# Altium PCB CW308T_SPC56.PcbDoc (part 2 of 2)
Units mil, origin at the board's own origin, x right, y up, seen from the top; angles counter-clockwise.
Board outline 2060 x 3180 mil, 2 copper layers (Component Side, Solder Side), stack 62.8 mil thick; 83 components, 64 nets, 689 pads, 120 vias.
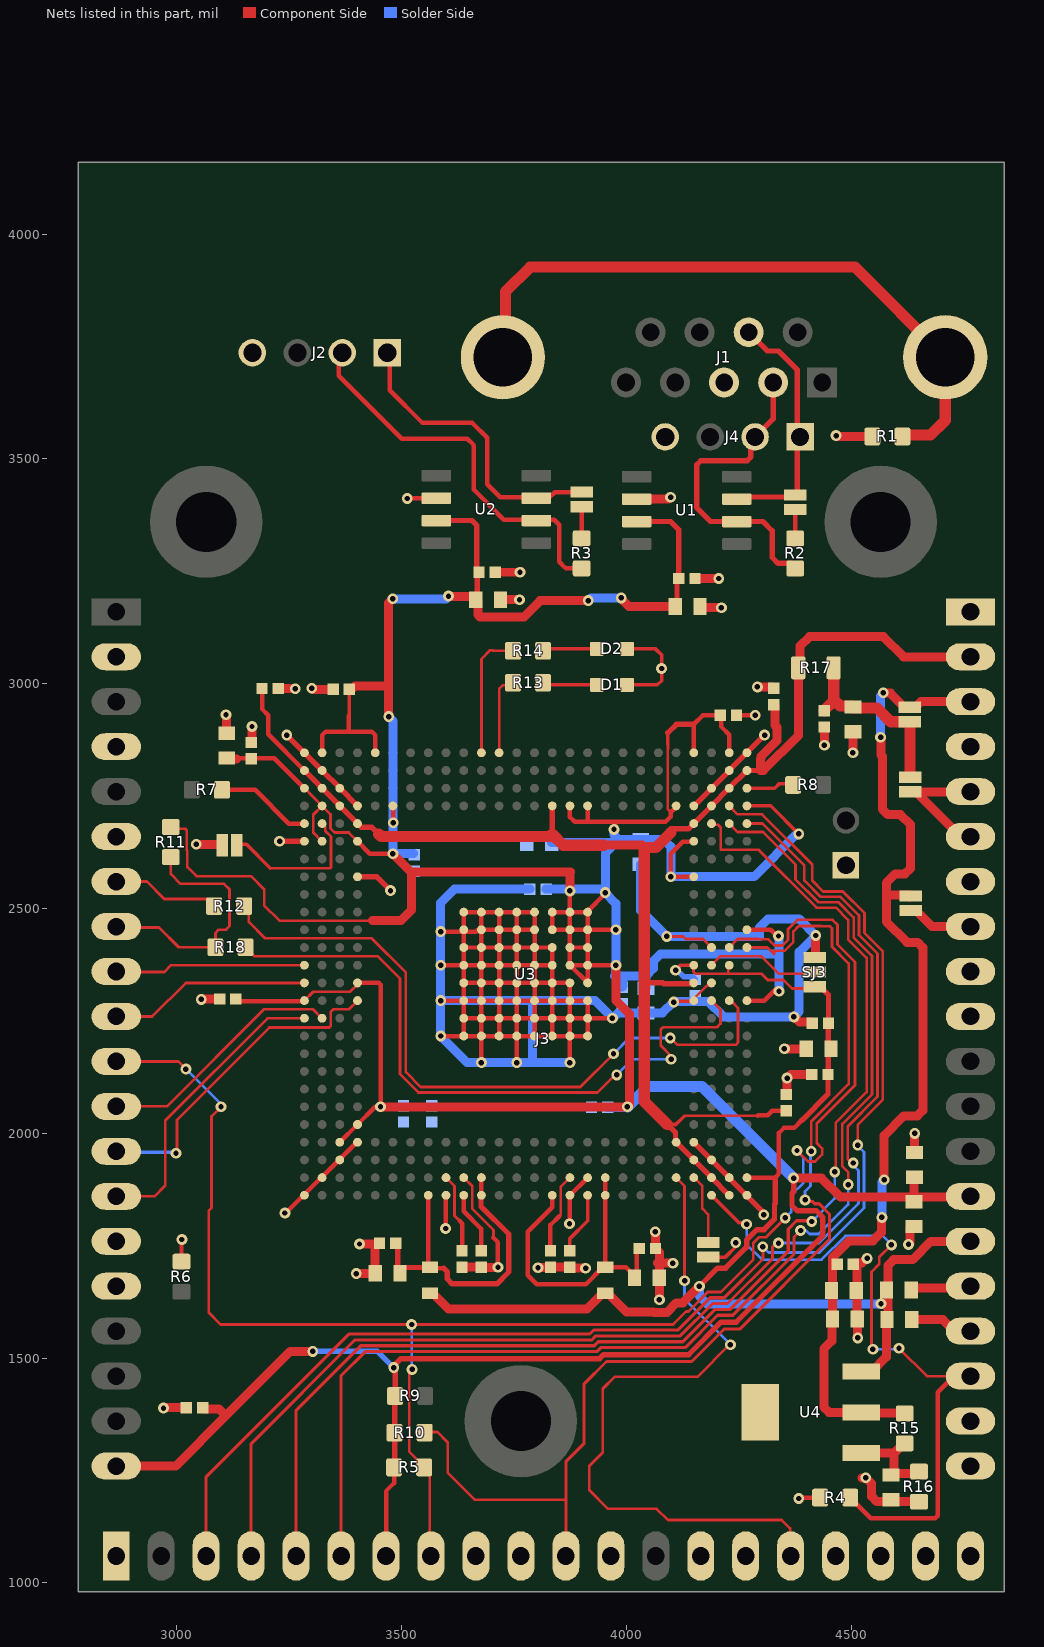
[diagram p2: the nets of this part, all layers, seen from the top]

## Via types
v1: diameter 24, hole 12, Component Side to Solder Side, tented both sides, 120 vias

## Nets (pads, with @x,y where several pads share a name; then routed paths per layer and width w, separated by ;. In a path a pad name is that pad's centre, name@x,y a point inside that pad or via, vN(x,y) a via of type N, cw(c..) or ccw(c..) an arc to the next point about the centre after c; other vN are vias at no path point) (continued)
GND: B1.2 B2.2 B3.2 C1.2 C2.2 C3.2 C4.2 C5.2 C6.2 C7.2 C8.2 C9.2 C10.2 C11.2 C12.2 C13.2 C14.2 C15.2 C16.2 C17.2 C18.2 C19.2 C20.2 C21.2 C22.2 C23.2 C24.2 C25.2 C26.2 C27.2 C28.2 C29.2 C30.2 C31.2 C32.2 C33.2 C34.2 C35.2 C36.2 C37.2 C38.2 C39.2 C40.2 C41.2 D1.K D2.K J1.3 J2.4 J3.A2 J3.A4 J3.A6 J3.A15 J3.A16 J3.B1 J3.B9 J3.B10 J3.B12 J3.B14 J3.C1 J3.C4 J3.C7 J3.C9 J3.C10 J3.C16 J3.C17 J4.4 JP1.1 R1.1 R4.1 R6.2 R16.2 SJ3.1 SJ4.1 SJ8.1 U1.2 U2.2 U3.A1 U3.A11 U3.A18 U3.A26 U3.AA26 U3.AC4 U3.AC23 U3.AD3 U3.AD24 U3.AE2 U3.AE25 U3.AF1 U3.AF26 U3.B2 U3.B10 U3.B17 U3.B25 U3.C3 U3.C24 U3.D4 U3.D23 U3.K10 U3.K11 U3.K12 U3.K13 U3.K14 U3.K15 U3.K16 U3.K17 U3.L10 U3.L11 U3.L12 U3.L13 U3.L14 U3.L15 U3.L16 U3.L17 U3.M4 U3.M10 U3.M11 U3.M12 U3.M13 U3.M14 U3.M15 U3.M16 U3.M17 U3.N3 U3.N11 U3.N12 U3.N13 U3.N14 U3.N15 U3.N16 U3.N17 U3.P12 U3.P13 U3.P14 U3.P15 U3.P16 U3.P17 U3.R3 U3.R12 U3.R13 U3.R14 U3.R15 U3.R16 U3.R17 U3.T13 U3.T14 U3.T15 U3.T16 U3.T17 U3.U13 U3.U14 U3.U15 U3.U16 U3.U17 U3.W23 | length 11098.8
  Component Side w6: U3.B17@3637.8,1901.58 3657,1882.37 3657,1832 3704,1785 3704,1768 ; v1@4093.64,2433.91 v1(4089.57,2437.99) 4126.01,2437.99 4131.77,2432.23 4170.13,2432.23 U3.R3@4188.98,2413.39 ; U3.M4@4147.97,2293.64 U3.M4@4149.61,2295.28 4152.23,2297.89 4152.23,2302.2 4177.83,2327.8 4178.43,2327.8 4185.27,2334.65 U3.N3@4188.98,2334.65
  Component Side w8: R6.2@3010.06,1714.64 3010.06,1761.06 3011,1762 v1(3011,1764) ; D1.K@4001.08,2997.57 4068.57,2997.57 4078,3007 v1(4078,3034) 4078,3064 4064.58,3077.42 D2.K@4001.08,3077.42 ; v1(4105,2292) 4106.64,2293.64 U3.M4@4147.97,2293.64 ; SJ4.1@4181.46,1724.88 4219.88,1724.88 4244,1749 4244,1756 v1(4243,1757)
  Component Side w10: v1(3240.15,1822.83) 3242.12,1822.83 3399.6,1980.32 U3.D23@3401.58,1980.32 ; v1(3512,3412) 3513,3413 U2.2@3576.78,3413 ; v1(3586.6,2216.53) U3.K17@3637.8,2216.54 ; v1(3586.6,2295.27) U3.M17@3637.8,2295.28 ; v1(3586.6,2374.01) U3.P17@3637.8,2374.02 ; v1(3586.6,2448.82) U3.T17@3637.8,2448.82 ; v1(3597.44,1788.39) 3597.93,1788.88 3597.93,1861.71 U3.A18@3598.43,1862.21 ; v1(3677.16,2157.48) U3.K16@3677.17,2216.54 ; 3704,1768 3714,1758 v1(3714,1702) ; v1(3755.9,2157.48) U3.K14@3755.91,2216.54 ; U3.U13@3795.28,2492.13 U3.U14@3755.91,2492.13 ; U3.U13@3795.28,2492.13 U3.T13@3795.28,2452.76 ; v1(3873,1799) 3873.51,1799.51 3873.51,1861.7 U3.A11@3874.02,1862.21 U3.B10@3913.39,1901.58 ; v1(3874.01,2157.48) U3.K11@3874.02,2216.54 ; v1(3968.49,2255.9) U3.L10@3913.39,2255.91 ; C13.2@4064.34,1743.92 4068.57,1739.69 4068.57,1711.45 4068.57,1683.21 C14.2@4072.79,1678.99 ; v1(4103,1711) v1@4106.79,1711 ; C32.2@4244.67,2929.97 v1(4286,2930) ; v1(4383,1188) 4385,1190 R4.1@4430.54,1190 ; v1@4439.57,2863.43 4439.78,2863.22 v1(4440,2863) ; v1(4503.5,2846.5) v1@4504,2846 ; U3.K17@3637.8,2216.54 U3.L17@3637.8,2255.91 ; U3.K17@3637.8,2216.54 U3.K16@3677.17,2216.54 ; U3.L17@3637.8,2255.91 U3.M17@3637.8,2295.28 ; U3.L17@3637.8,2255.91 U3.L16@3677.17,2255.91 ; U3.M17@3637.8,2295.28 U3.M16@3677.17,2295.28 ; U3.M17@3637.8,2295.28 U3.N17@3637.8,2334.65 ; U3.N17@3637.8,2334.65 U3.P17@3637.8,2374.02 ; U3.N17@3637.8,2334.65 U3.N16@3677.17,2334.65 ; U3.P17@3637.8,2374.02 U3.R17@3637.8,2413.39 ; U3.P17@3637.8,2374.02 U3.P16@3677.17,2374.02 ; U3.R17@3637.8,2413.39 U3.T17@3637.8,2448.82 ; U3.R17@3637.8,2413.39 U3.R16@3677.17,2413.39 ; U3.T17@3637.8,2448.82 3665.34,2448.82 3669.28,2452.76 U3.T16@3677.17,2452.76 ; U3.T17@3637.8,2448.82 U3.T17@3637.8,2452.76 U3.U17@3637.8,2492.13 U3.U16@3677.17,2492.13 ; U3.K16@3677.17,2216.54 U3.L16@3677.17,2255.91 ; U3.K16@3677.17,2216.54 U3.K15@3716.54,2216.54 ; U3.L16@3677.17,2255.91 U3.M16@3677.17,2295.28 ; U3.L16@3677.17,2255.91 U3.L15@3716.54,2255.91 ; U3.M16@3677.17,2295.28 U3.M15@3716.54,2295.28 ; U3.M16@3677.17,2295.28 U3.N16@3677.17,2334.65 ; U3.N16@3677.17,2334.65 U3.P16@3677.17,2374.02 ; U3.N16@3677.17,2334.65 U3.N15@3716.54,2334.65 ; U3.P16@3677.17,2374.02 U3.R16@3677.17,2413.39 ; U3.P16@3677.17,2374.02 U3.P15@3716.54,2374.02 ; U3.R16@3677.17,2413.39 U3.T16@3677.17,2452.76 ; U3.R16@3677.17,2413.39 U3.R15@3716.54,2413.39 ; U3.T16@3677.17,2452.76 U3.U16@3677.17,2492.13 ; U3.T16@3677.17,2452.76 U3.T15@3716.54,2452.76 ; U3.U16@3677.17,2492.13 U3.U15@3716.54,2492.13 ; U3.K15@3716.54,2216.54 U3.L15@3716.54,2255.91 ; U3.K15@3716.54,2216.54 U3.K14@3755.91,2216.54 ; U3.L15@3716.54,2255.91 U3.M15@3716.54,2295.28 ; U3.L15@3716.54,2255.91 U3.L14@3755.91,2255.91 ; U3.M15@3716.54,2295.28 U3.M14@3755.91,2295.28 ; U3.M15@3716.54,2295.28 U3.N15@3716.54,2334.65 ; U3.N15@3716.54,2334.65 U3.P15@3716.54,2374.02 ; U3.N15@3716.54,2334.65 U3.N14@3755.91,2334.65 ; U3.P15@3716.54,2374.02 U3.R15@3716.54,2413.39 ; U3.P15@3716.54,2374.02 U3.P14@3755.91,2374.02 ; U3.R15@3716.54,2413.39 U3.T15@3716.54,2452.76 ; U3.R15@3716.54,2413.39 U3.R14@3755.91,2413.39 ; U3.T15@3716.54,2452.76 U3.U15@3716.54,2492.13 ; U3.T15@3716.54,2452.76 U3.T14@3755.91,2452.76 ; U3.U15@3716.54,2492.13 U3.U14@3755.91,2492.13 ; U3.K14@3755.91,2216.54 U3.L14@3755.91,2255.91 ; U3.K14@3755.91,2216.54 U3.K13@3795.28,2216.54 ; U3.L14@3755.91,2255.91 U3.M14@3755.91,2295.28 ; U3.L14@3755.91,2255.91 U3.L13@3795.28,2255.91 ; U3.M14@3755.91,2295.28 U3.M13@3795.28,2295.28 ; U3.M14@3755.91,2295.28 U3.N14@3755.91,2334.65 ; U3.N14@3755.91,2334.65 U3.P14@3755.91,2374.02 ; U3.N14@3755.91,2334.65 U3.N13@3795.28,2334.65 ; U3.P14@3755.91,2374.02 U3.R14@3755.91,2413.39 ; U3.P14@3755.91,2374.02 U3.P13@3795.28,2374.02 ; U3.R14@3755.91,2413.39 U3.T14@3755.91,2452.76 ; U3.R14@3755.91,2413.39 U3.R13@3795.28,2413.39 ; U3.T14@3755.91,2452.76 U3.U14@3755.91,2492.13 ; U3.T14@3755.91,2452.76 U3.T13@3795.28,2452.76 ; U3.K13@3795.28,2216.54 U3.L13@3795.28,2255.91 ; U3.K13@3795.28,2216.54 U3.K12@3834.65,2216.54 ; U3.L13@3795.28,2255.91 U3.M13@3795.28,2295.28 ; U3.L13@3795.28,2255.91 U3.L12@3834.65,2255.91 ; U3.M13@3795.28,2295.28 U3.M12@3834.65,2295.28 ; U3.M13@3795.28,2295.28 U3.N13@3795.28,2334.65 ; U3.N13@3795.28,2334.65 U3.P13@3795.28,2374.02 ; U3.N13@3795.28,2334.65 U3.N12@3834.65,2334.65 ; U3.P13@3795.28,2374.02 U3.R13@3795.28,2413.39 ; U3.P13@3795.28,2374.02 U3.P12@3834.65,2374.02 ; U3.R13@3795.28,2413.39 U3.T13@3795.28,2452.76 ; U3.R13@3795.28,2413.39 U3.R12@3834.65,2413.39 U3.P12@3834.65,2374.02 ; U3.K12@3834.65,2216.54 U3.L12@3834.65,2255.91 ; U3.K12@3834.65,2216.54 U3.K11@3874.02,2216.54 ; U3.L12@3834.65,2255.91 U3.M12@3834.65,2295.28 ; U3.L12@3834.65,2255.91 U3.L11@3874.02,2255.91 ; U3.M12@3834.65,2295.28 U3.M11@3874.02,2295.28 ; U3.M12@3834.65,2295.28 U3.N12@3834.65,2334.65 ; U3.N12@3834.65,2334.65 U3.P12@3834.65,2374.02 ; U3.N12@3834.65,2334.65 U3.N11@3874.02,2334.65 U3.M11@3874.02,2295.28 ; U3.K11@3874.02,2216.54 U3.L11@3874.02,2255.91 ; U3.K11@3874.02,2216.54 U3.K10@3913.39,2216.54 U3.L10@3913.39,2255.91 ; U3.L11@3874.02,2255.91 U3.M11@3874.02,2295.28 ; U3.L11@3874.02,2255.91 U3.L10@3913.39,2255.91 ; U3.M11@3874.02,2295.28 U3.M10@3913.39,2295.28 U3.L10@3913.39,2255.91
  Component Side w12: v1(3228.34,2649.6) U3.AA26@3283.47,2649.61 ; v1(3244.08,2885.82) v1@3248.02,2881.89 ; v1@3248.04,2881.89 U3.AF26@3283.47,2846.46 U3.AE25@3322.84,2807.09 U3.AD24@3362.21,2767.72 U3.AC23@3401.58,2728.35 ; U3.W23@3401.58,2570.87 3444.13,2570.87 v1(3475,2540) ; U3.D4@4149.61,1980.32 4149.61,1979.82 4305.07,1824.36 4305,1824.29 v1(4305,1819) ; U3.AC4@4149.61,2728.35 v1(4307.08,2885.82)
  Component Side w20: v1(2970,1389) 2971,1390 C37.2@3020.89,1390 ; v1(3043,2643) 3098.77,2643 SJ8.1@3100.65,2641.12 ; v1(3054,2298) 3054.5,2298.5 3094.39,2298.5 C35.2@3094.89,2299 ; v1(3109,2931) 3109.77,2930.23 3109.77,2890.84 C18.2@3110.85,2889.76 ; C17.2@3164.97,2869.5 3167,2871.53 v1(3167,2905) ; B2.2@3225.46,2989.5 3225.96,2989 v1(3263,2989) ; v1(3300,2990) 3302.38,2987.62 C28.2@3347.29,2987.62 ; v1(3399,1688) 3399.48,1688.48 3440.46,1688.48 C16.2@3440.94,1688.96 3440.94,1746.44 C15.2@3448.49,1754 ; v1(3406,1754) C15.2@3448.49,1754 ; C15.2@3450.39,1755.89 C15.2@3448.49,1754 ; C19.2@3633.86,1702.36 C20.2@3677.17,1702.36 3677.35,1702.18 3713.82,1702.18 v1(3714,1702) ; C4.2@3708.11,3248 v1(3763,3248) v1@3765,3250 ; C3.2@3719.56,3187 v1(3762,3187) ; v1(3803,1701) 3803.68,1701.68 3830.03,1701.68 C22.2@3830.71,1702.36 3873.31,1702.36 3874.92,1700.75 3908.25,1700.75 v1(3909,1700) ; U1.2@4022.64,3410.83 4092.74,3410.83 4096.92,3415 v1(4098,3415) ; v1(4064,1781) 4064.17,1780.83 4064.17,1744.09 C13.2@4064.34,1743.92 ; 4068.57,1711.45 4072.79,1711.45 ; C13.2@4068.57,1739.69 4072.79,1735.47 4072.79,1711.45 ; v1(4073,1630) 4073,1678.78 C14.2@4072.79,1678.99 4072.79,1711.45 ; v1(4103,1711) 4102.55,1711.45 4072.79,1711.45 ; C2.2@4152.11,3234 v1(4205,3234) ; C1.2@4163.56,3172 4165.79,3169.77 4210.23,3169.77 v1(4211,3169) ; v1(4291,2993) 4291.77,2992.23 4324.71,2992.23 B3.2@4327.3,2989.65 ; v1(4351,2188) C41.2@4399.44,2188 ; B1.2@4355.5,2086.46 4357,2087.96 v1(4357,2123) 4358.08,2123 4366.08,2131 C39.2@4411.89,2131 ; v1(4372.28,2259) 4373.37,2259 4384.77,2247.6 4410.29,2247.6 C38.2@4412.89,2245 ; SJ3.1@4418.5,2391.11 4420.23,2392.84 4420.23,2439.23 v1(4421,2440) ; C12.2@4439.57,2903.9 4439.78,2903.68 v1@4439.78,2863.22 ; v1(4466,3552) 4468,3550 R1.1@4546.54,3550 ; v1(4503.5,2846.5) C11.2@4503.5,2893.39 ; v1(4514,1545) 4513.48,1545.52 4513.48,1586.63 C8.2@4512.97,1587.15 4512.97,1700.7 C9.2@4504.52,1709.15 4507.12,1711.75 4523.67,1711.75 4533.92,1722 v1(4535,1722) ; v1@4524,1234 v1(4532,1234) 4545,1221 4545,1192.4 4556.72,1180.68 R16.2@4650.41,1180.68 ; v1(4627,1753) 4630.62,1756.62 4630.62,1788.32 4635.38,1793.08 C23.2@4639.05,1793.08 ; C6.2@4633.15,1651.85 4637.22,1655.93 4760.93,1655.93 J3.C16@4765,1660 ; C5.2@4634.15,1585.85 4703.33,1585.85 4729.18,1560 J3.C17@4765,1560 ; C24.2@4640.15,1957.41 4640.57,1957.83 4640.57,1999.57 v1(4641,2000)
  Solder Side w20: C33.2@3785.03,2543.31 3617.31,2543.31 3586.6,2512.6 v1(3586.6,2448.82) v1(3586.6,2374.01) v1(3586.6,2295.27) ; 3791.34,2295.27 v1(3586.6,2295.27) ; v1(3874.01,2157.48) 3793,2157.48 ; v1(3968.49,2255.9) v1@3969.31,2255.9 ; C25.2@4031.5,2598.43 4031.5,2496.06 v1(4089.57,2437.99) 4296.01,2437.99 4296.01,2458.01 4315,2477 4384,2477 v1(4421,2440) 4384,2403 4384,2270.72 v1(4372.28,2259) 4216,2259 4182.23,2292.77 v1@4104.68,2292.77 ; v1(4105,2292) 4103.92,2292 4079.92,2268 4043.59,2268 C26.2@4043.31,2267.72 3981.12,2267.72 v1@3969.31,2255.9 ; v1(3586.6,2295.27) v1(3586.6,2216.53) 3645.66,2157.48 v1(3677.16,2157.48) v1(3755.9,2157.48) 3793,2157.48 ; 3793,2157.48 3791.34,2159.14 3791.34,2295.28 3929.93,2295.28 v1@3969.31,2255.9
GPIO3: J3.A9 U3.P26 | length 425.1
  Component Side w6: J3.A9@2865,2360 2866,2359 2972,2359 2987.02,2374.02 U3.P26@3283.47,2374.02
GPIO4: J3.A10 U3.N26 | length 449.4
  Component Side w6: J3.A10@2865,2260 2945,2260 3019.65,2334.65 U3.N26@3283.47,2334.65
HDR5: J3.B15
HDR6: J3.B16 U3.B5 | length 1527.9
  Component Side w6: U3.B5@4110.24,1901.58 4129.08,1882.73 4129.08,1843.08 4129,1843 v1(4129,1672) ; v1(4231,1530) 4229.3,1530 4157.8,1458.5 3973.5,1458.5 3947,1432 3947,1289.94 3917,1259.94 3917,1206.7 3958.7,1165 4067,1165 4092,1140 4345,1140 4364,1121 4364,1061 J3.B16@4365,1060
  Solder Side w6: v1(4129,1672) 4129,1632 v1(4231,1530)
HDR7: J3.B17
HDR8: J3.B18
HDR9: J3.B19
HDR10: J3.B20
JCOMP: J3.B11 R10.2 U3.R1 | length 2518.1
  Component Side w6: R10.2@3551.17,1335.6 3579.4,1335.6 3602,1313 3602,1246 3663,1185 3865,1185 ; U3.R1@4267.72,2413.39 4313.61,2413.39 4328,2399 4328,2406 4351.67,2406 4371,2425.33 4371,2449 4383,2461 4432.15,2461 4432.64,2460.51 4452.49,2460.51 4457,2456 4457,2415.07 4494,2378.07 4494,2110 4411,2027 v1(4411,1960)
  Component Side w7: J3.B11@3865,1060 3865,1185 3865,1269.79 3905.66,1310.45 3905.66,1442.72 3955.44,1492.5 4144.71,1492.5 4216.71,1564.5 4251.5,1564.5 4451.5,1764.5 4451.5,1820.36 4428.36,1843.5 4418.09,1843.5 4412.85,1848.75 4400.25,1848.75 v1(4397,1852)
  Solder Side w6: v1(4397,1852) 4397,1871 4409,1883 4409,1958 v1(4411,1960)
LED1: J3.C18 R4.2 U3.A3 | length 1553.7
  Component Side w6: v1(4548,1520) 4545,1523 4545,1692 4562,1709 4562,1725 v1(4589,1752) ; v1(4606,1522) 4668,1460 4728,1460 J3.C18@4765,1460
  Component Side w8: U3.A3@4188.98,1862.21 4250.12,1801.06 4263.94,1801.06 v1(4267,1798)
  Component Side w10: R4.2@4497.46,1190 4497.46,1188.03 4510.18,1175.31 4512.15,1175.31 4543.46,1144 4686.14,1144 4692,1149.86 4692,1424 J3.C18@4728,1460
  Solder Side w6: v1(4267,1798) 4267,1753 4301,1719 4434,1719 4487,1772 4570,1772 4589,1753 v1(4589,1752) ; v1(4548,1520) 4604,1520 v1(4606,1522)
LED2: J3.C19
LED3: J3.C20
LED_BLOAD: R14.1 U3.AF16 | length 287.7
  Component Side w6: U3.AF16@3677.17,2846.46 3677.17,3055.17 3696.51,3074.51 3701.49,3074.51 3702.74,3073.26 R14.1@3747.57,3073.26
LED_CLKOK: R13.1 U3.AF15 | length 178.8
  Component Side w6: U3.AF15@3716.54,2846.46 3716.54,2988.54 3725,2997 3742.26,2997 R13.1@3747.57,3002.32
MISO: J3.A13 U3.M23 | length 739.6
  Component Side w6: v1(2998,1956) 3000,1958 3000,2030 3205.38,2235.38 3338.49,2235.38 3342,2238.89 3342,2270 3348,2276 3383,2276 3401.58,2294.58 U3.M23@3401.58,2295.28
  Solder Side w8: J3.A13@2865,1960 2867,1958 2996,1958 v1(2998,1956)
MOSI: J3.A14 U3.L26 | length 667.4
  Component Side w6: J3.A14@2865,1860 2950,1860 2974,1884 2974,2028.94 3200.97,2255.91 U3.L26@3283.47,2255.91
NetC10_1: C10.1 R15.2 R16.1 U4.1 | length 225.1
  Component Side w20: U4.1@4521.8,1289.09 4595.32,1289.09 ; R15.2@4618.59,1310.39 4616.62,1310.39 4595.32,1289.09 ; R16.1@4650.41,1247.61 4646.59,1243.79 C10.1@4594.38,1243.79 ; C10.1@4594.38,1243.79 4595.32,1244.73 4595.32,1289.09 ; C10.1@4594.38,1243.79 4590.56,1239.97 C10.1@4587.85,1239.97 4591.67,1243.79 C10.1@4594.38,1243.79
NetC11_1: C11.1 C12.1 R17.2 SJ5.1 SJ6.2 | length 418.5
  Component Side w25: C12.1@4439.57,2940.12 4460.63,2961.18 4460.63,2965.37 ; R17.2@4460.63,3035.43 4460.63,2965.37 ; SJ6.2@4630.85,2791.97 4630.58,2791.97 4630.58,2915.55 SJ5.1@4630.31,2915.55 4587.45,2915.55 4556.76,2946.24 4505.77,2946.24 C11.1@4503.5,2948.5 4501.24,2950.77 4475.23,2950.77 4460.63,2965.37
NetC13_1: C13.1 C14.1 L1.1 U3.A9 U3.A12 U3.B9 | length 742.6
  Component Side w10: U3.A12@3834.65,1862.21 3834.65,1835.63 3780,1780.98 3780,1684.52 3800.15,1664.37 3909.62,1664.37 3947.23,1701.98 L1.1@3952.74,1701.98 ; U3.B9@3952.76,1901.58 U3.A9@3952.76,1862.21 L1.1@3952.76,1701.99 ; C13.1@4028.12,1743.92 4022.9,1738.69 4022.9,1684.21 C14.1@4017.67,1678.99 4017.67,1682.92 3998.62,1701.98 L1.1@3952.74,1701.98
NetC15_1: C15.1 C16.1 L2.1 U3.A16 U3.A19 U3.B16 | length 753.5
  Component Side w10: U3.A19@3559.06,1862.21 3559.06,1705.9 L2.1@3562.98,1701.98 3565.16,1699.8 3593.5,1699.8 ; U3.A16@3677.17,1862.21 U3.B16@3677.17,1901.58
  Component Side w12: C15.1@3486.61,1755.89 3491.33,1751.17 3491.33,1693.69 C16.1@3496.05,1688.96 3496.05,1692.9 3504.82,1701.66 3562.66,1701.66 L2.1@3562.98,1701.98 ; 3593.5,1699.8 3601.38,1691.93 3601.38,1676.18 3612.2,1665.35 3711.61,1665.35 3738,1691.74 3738,1775.78 3676.18,1837.6 3676.18,1861.22 U3.A16@3677.17,1862.21
NetC19_1: C19.1 U3.B18 | length 178.5
  Component Side w6: U3.B18@3598.43,1901.58 3617.27,1882.73 3617.27,1816.79 3628.94,1805.12
  Component Side w10: 3628.94,1805.12 3634.84,1799.21 3634.84,1739.57 C19.1@3633.86,1738.58
NetC20_1: C20.1 U3.A17 | length 139.9
  Component Side w10: U3.A17@3637.8,1862.21 3637.8,1826.77 3677.17,1787.4 C20.1@3677.17,1738.58
NetC21_1: C21.1 U3.A10 | length 139.9
  Component Side w8: C21.1@3874.02,1738.58 3874.02,1766.02 3913.39,1805.39 U3.A10@3913.39,1862.21
NetC22_1: C22.1 U3.B11 | length 180.9
  Component Side w6: 3850.39,1815.94 3853.52,1819.07 3853.52,1881.08 U3.B11@3874.02,1901.58
  Component Side w10: C22.1@3830.71,1738.58 3830.71,1796.26 3850.39,1815.94
NetD1_A: D1.A R13.2 | length 121.6
  Component Side w8: R13.2@3814.5,3002.32 3819.25,2997.57 D1.A@3934.15,2997.57
NetD2_A: D2.A R14.2 | length 121.4
  Component Side w8: R14.2@3814.5,3073.26 3818.67,3077.42 D2.A@3934.15,3077.42
NetJ1_2: J1.2 J4.2 R2.2 U1.6 | length 718.4
  Component Side w12: J1.2@4325.94,3670 4325.94,3588.94 J4.2@4286,3549 4276.62,3539.62 4276.62,3504.62 4268,3496 4165,3496 4156,3487 4156,3392 4187.17,3360.83 U1.6@4245.08,3360.83 4303.17,3360.83 4324,3340 4324,3281 4337.31,3267.69 4363.85,3267.69 R2.2@4375,3256.54
NetJ1_7: J1.7 J4.1 SJ1.2 U1.7 | length 557.1
  Component Side w12: U1.7@4245.08,3410.83 4249.67,3415.41 4370.41,3415.41 SJ1.2@4375,3420 4380,3425 4380,3554 4380,3698 4338,3740 4313.23,3740 J1.7@4271.42,3781.81
NetJ1_10: J1.10 J1.11 R1.2 | length 1482.8
  Component Side w25: J1.10@3724.96,3725.9 3731,3731.94 3731,3872 3786,3927 4507.72,3927 J1.11@4708.82,3725.9 4708.82,3585.82 4676,3553 4616.46,3553 R1.2@4613.46,3550
NetJ2_1: J2.1 SJ2.2 U2.7 | length 677.6
  Component Side w10: J2.1@3467.72,3736.22 3473,3730.94 3473,3653 3546,3580 3657,3580 3690,3547 3690,3444 3719,3415 3781.22,3415 3783.22,3413 3827,3413 3840.22,3426.22 SJ2.2@3900,3426.22
NetJ2_2: J2.2 R3.2 U2.6 | length 878.5
  Component Side w10: J2.2@3367.72,3736.22 3360,3728.5 3360,3685 3500,3545 3646,3545 3660,3531 3660,3432 3727,3365 3781.22,3365 3839,3365 3850,3354 3850,3271 3862,3259 3862.85,3259 3865.31,3256.54 R3.2@3900,3256.54
NetJ3_A7: J3.A7 R12.2 | length 255.1
  Component Side w6: J3.A7@2875,2550 J3.A7@2865,2560 2933,2560 2971.79,2521.21 3068.01,2521.21 3082.61,2506.6 R12.2@3082.61,2505.41
NetJ3_A8: J3.A8 R11.1 R18.2 | length 573.4
  Component Side w6: J3.A8@2865,2460 2867,2458 2960,2458 3004,2414 R18.2@3085.54,2414 3085.54,2445.54 3093,2453 3109,2453 3117,2461 3117,2543 3105,2555 3008,2555 2986.35,2576.65 R11.1@2986.35,2614.46
NetJ3_C5: J3.C5 J3.C6 SJ6.1 | length 309.7
  Component Side w20: J3.C6@4765,2660 4742.88,2660 4643.35,2759.54 SJ6.1@4630.85,2759.54 4631.08,2759.77 4764.77,2759.77 J3.C5@4765,2760
NetJ3_C8: J3.C8 SJ7.1 | length 148.1
  Component Side w20: SJ7.1@4631.63,2495.54 4644.13,2495.54 4679.67,2460 J3.C8@4765,2460
NetR2_1: R2.1 SJ1.1 | length 64.1
  Component Side w10: R2.1@4375,3323.46 SJ1.1@4375,3387.57
NetR3_1: R3.1 SJ2.1 | length 70.3
  Component Side w10: R3.1@3900,3323.46 SJ2.1@3900,3393.78
NetR7_1: R7.1 U3.AB26 | length 214.5
  Component Side w10: R7.1@3100.12,2764.13 3173.86,2764.13 3249.01,2688.98 U3.AB26@3283.47,2688.98
NetR8_1: R8.1 U3.AD1 | length 108.3
  Component Side w8: U3.AD1@4267.72,2767.72 4329.72,2767.72 4340,2778 4367.54,2778 R8.1@4370.54,2775
NetSJ3_2: SJ3.2 U3.P3 | length 248.8
  Component Side w6: U3.P3@4188.98,2374.02 4208.96,2394 4299.35,2394 4338.17,2355.17 4407,2355.17 SJ3.2@4411.5,2359.68
NetSJ4_2: SJ4.2 U3.B4 | length 157.5
  Component Side w6: U3.B4@4149.61,1901.58 4168.45,1882.73 4168.45,1832.55 4181.46,1819.54 SJ4.2@4181.46,1757.32
NetSJ8_2: SJ8.2 U3.AB25 | length 338.6
  Component Side w6: 3207.82,2589.71 3340.69,2589.71 3342.52,2591.54 3342.52,2660.19 3329.68,2673.04 3329.68,2682.13 U3.AB25@3322.84,2688.98
  Component Side w8: SJ8.2@3133.08,2641.12 3134.96,2643 3154.53,2643 3207.82,2589.71
NRST: J3.A11 J3.B8 R5.2 U3.R2 | length 3807.2
  Component Side w6: J3.A11@2865,2160 3003,2160 v1(3020,2143) ; v1(3098,2059) 3077,2038 3077,1834.15 3071,1828.15 3071,1601 3097,1575 v1(3522,1575) 4103.7,1575 4132.7,1604 4137.6,1604 4180.6,1647 4210,1647 4282,1719 4282,1756.7 4294.3,1769 4310.15,1769 4353,1811.85 v1(4353,1812) ; v1(3523,1475) 3517,1469 3517,1291.7 3549.73,1258.97 R5.2@3549.73,1257 3562.51,1244.22 3562.51,1062.49 J3.B8@3565,1060 ; U3.R2@4228.39,2413.39 4247.23,2432.23 4292.77,2432.23 4293,2432 4315,2432 4329,2418 4346.7,2418 4359,2430.3 4359,2454 4380,2475 4458,2475 4469,2464 4469,2420.04 4508,2381.04 4508,2106.97 4423,2021.97 4423,1978.3 4435,1966.3 4435,1953 4419.49,1937.49 4403.51,1937.49 v1(4379,1962)
  Solder Side w6: v1(3020,2143) 3098,2065 v1(3098,2059) ; v1(3522,1575) 3522.5,1574.5 3522.5,1475.5 v1(3523,1475) ; v1(4353,1812) 4366,1825 4366,1862.97 4393.06,1890.03 4393.06,1946.36 4379,1960.41 v1(4379,1962)
SCK: J3.A12 U3.L25 | length 555.6
  Component Side w6: J3.A12@2865,2060 2978,2060 3194,2276 3302.74,2276 U3.L25@3322.84,2255.91
TCK: J3.B6 U3.AB2 | length 2785.9
  Component Side w6: U3.AB2@4228.35,2688.98 4247.19,2670.13 4303.87,2670.13 4375.94,2598.06 4375.94,2565.03 4426.97,2514 4470.91,2514 4505,2479.91 4505,2435.97 4546,2394.97 4546,2086.72 4480,2020.72 4480,1926.72 4493,1913.72 v1(4493,1886)
  Component Side w7: J3.B6@3365,1060 3365,1461 3418.5,1514.5 3933.6,1514.5 3942.6,1523.5 4130.25,1523.5 4202.25,1595.5 4236.5,1595.5 4372.5,1731.5 4372.5,1769.5 v1(4387,1784)
  Solder Side w6: v1(4387,1784) 4399,1784 4407,1776 4427,1776 4493,1842 v1(4493,1886)
TDI: J3.B3 U3.AC2 | length 3036.7
  Component Side w6: U3.AC2@4228.35,2728.35 4247.19,2709.5 4301.5,2709.5 4412.96,2598.04 4412.96,2561.95 4436.91,2538 4480.85,2538 4529,2489.85 4529,2445.91 4570,2404.91 4570,2075 4514,2019 v1(4514,1974) ; v1(4303,1748) 4303.5,1747.5 4303.5,1720.5
  Component Side w7: J3.B3@3065,1060 3065,1236 3382.5,1553.5 3917.44,1553.5 3926.44,1562.5 4114.09,1562.5 4186.09,1634.5 4217.5,1634.5 4303.5,1720.5
  Solder Side w6: v1(4303,1748) 4316,1735 4429,1735 4528,1834 4528,1958.3 4514,1972.3 v1(4514,1974)
TDO: J3.B4 U3.AB1 | length 2886.1
  Component Side w6: U3.AB1@4267.72,2688.98 4302.02,2688.98 4395.43,2595.57 4395.43,2562.51 4431.94,2526 4475.88,2526 4517,2484.88 4517,2440.94 4558,2399.94 4558,2081.75 4492,2015.75 4492,1943 4501,1934 v1(4504,1934)
  Component Side w7: J3.B4@3165,1060 3165,1310 3395.5,1540.5 3922.83,1540.5 3931.83,1549.5 4119.48,1549.5 4191.48,1621.5 4224.5,1621.5 4324.5,1721.5 4324.5,1747.59 v1@4335.46,1758.54
  Solder Side w6: v1(4338,1756) 4428,1756 4516,1844 4516,1917.13 4504,1929.13 v1(4504,1934)
TMS: J3.B5 U3.AB3 | length 2835
  Component Side w6: U3.AB3@4188.98,2688.98 4191.6,2686.36 4203.64,2686.36 4209.5,2680.5 4209.5,2631.5 4210.24,2630.76 4293.24,2630.76 4422,2502 4465.94,2502 4493,2474.94 4493,2431 4534,2390 4534,2091.69 4465,2022.69 4465,1916.38 v1(4462.82,1914.2)
  Component Side w7: J3.B5@3265,1060 3265,1384 3408.5,1527.5 3928.21,1527.5 3937.21,1536.5 4124.86,1536.5 4196.86,1608.5 4230.5,1608.5 4359.5,1737.5 4359.5,1786.91 4378.09,1805.5 4410.5,1805.5 v1(4412,1804)
  Solder Side w6: v1(4412,1804) 4462.82,1854.82 v1(4462.82,1914.2)
UART_RX: R18.1 U3.M3 | length 1509.3
  Component Side w6: R18.1@3152.46,2414 3152.46,2412.8 3167.07,2398.2 3168.27,2398.2 3172.46,2394 3446,2394 3496,2344 3496,2132 3537,2091 3935,2091 3974,2130 v1(3978,2130) ; v1(4099,2165) 4099,2172 4076,2195 4076,2231 4081,2236 4201,2236 4209,2244 4209,2275.25 U3.M3@4188.98,2295.28
  Solder Side w6: v1(3978,2130) 4013,2165 v1(4099,2165)
UART_TX: R12.1 U3.M2 | length 1575.8
  Component Side w6: R12.1@3149.54,2505.41 3159.83,2495.12 3159.83,2470.17 3196,2434 3196,2433.91 3409.38,2433.91 3409.47,2434 3433,2434 3508.97,2358.03 3508.97,2136 3541.97,2103 3897,2103 v1(3971,2177) ; v1@4097,2221 v1(4097,2212) 4098.7,2212 4113.7,2197 4243,2197 4248,2202 4248,2279 4231.72,2295.28 U3.M2@4228.35,2295.28
  Solder Side w6: v1(3971,2177) 4006,2212 v1(4097,2212)
VCC5V: C5.1 C6.1 C38.1 C39.1 C40.1 C41.1 J3.C15 L1.2 L2.2 SJ3.3 U3.B1 U3.P2 U3.P4 U4.3 | length 2920.6
  Component Side w6: U3.P4@4149.61,2374.02 4149,2373.41 4149,2359 4153,2355 4226.5,2355 ; U3.P2@4228.35,2374.02 4226.5,2372.17 4226.5,2355 ; SJ3.3@4418.5,2326.24 4414.27,2322 4368,2322 4349,2341 4314,2341 4300,2355 4226.5,2355
  Component Side w8: v1(4109,2363) 4120.02,2374.02 U3.P4@4149.61,2374.02
  Component Side w10: U3.B1@4267.72,1901.58 4330.58,1901.58 4339,1910 4339,2001 4350,2012 4373,2012 4390,2029
  Component Side w12: v1(4162,1660) 4202.38,1700.38 4220.32,1700.38 4267,1747.06 4267,1762.91 4290.07,1785.99 4305.93,1785.99 4329,1809.06 4329,1842.92 4330.58,1844.5 4330.58,1901.58 ; 4390,2029 4448.11,2087.11 C39.1@4448.11,2131 4448.61,2131.5 4448.61,2244.5 C38.1@4449.11,2245 4449.11,2308.13 4431,2326.24 SJ3.3@4418.5,2326.24
  Component Side w20: L2.2@3562.98,1644.5 3568.49,1644.5 3603.99,1609 3911.73,1609 3947.23,1644.5 L1.2@3952.74,1644.5 3958.26,1644.5 3999.76,1603 4060.4,1603 4061.4,1602 4090,1602 4111,1623 4125,1623 v1(4162,1660) ; U4.3@4521.8,1470.19 4545.43,1470.19 4578,1502.76 4578,1584.82 C5.1@4579.03,1585.85 4581,1587.82 4581,1618 ; v1(4566,1621) 4578,1621 4581,1618 ; J3.C15@4765,1760 4677,1760 4636,1719 4594,1719 4581,1706 4581,1618
  Solder Side w12: v1(4109,2363) 4112.25,2363 4126.54,2348.71 4146.4,2348.71 C40.1@4153,2342.11
  Solder Side w20: v1(4162,1660) 4162,1638 4179,1621 v1(4566,1621)
VCCINT: C7.1 C8.1 C9.1 J3.C3 R15.1 SJ5.2 SJ7.2 U4.2 U4.4 | length 2312.7
  Component Side w20: v1(4565,2881) 4565.77,2880.23 4565.77,2841.23 4569,2838 4569,2721 4581,2709 4609,2709 4631,2687 4631,2588.72 4619.28,2577 4598,2577 4578,2557 4578,2531 ; v1(4568,1813) 4567,1812 4567,1780 4548,1761 4495,1761 4457.85,1723.85 C8.1@4457.85,1587.15 4456.45,1585.75 4456.45,1538.45 4438.75,1520.75 4438.75,1391.35 4450.46,1379.64 U4.2@4521.8,1379.64 4522.96,1378.48 4617.43,1378.48 R15.1@4618.59,1377.31 ; v1(4571,2980) 4571.77,2979.23 4586.56,2979.23 4617.81,2947.98 SJ5.2@4630.31,2947.98 4642.81,2947.98 4654.82,2960 J3.C3@4765,2960 ; v1(4573,1897) 4573,1995 4617,2039 4647,2039 4659,2051 4659,2413.28 4647.28,2425 4624,2425 4578,2471 4578,2531 ; SJ7.2@4629.13,2525.47 SJ7.2@4631.63,2527.97 4629.13,2530.47 4578.53,2530.47 4578,2531
  Solder Side w20: v1(4565,2881) 4565,2972.92 4571,2978.92 v1(4571,2980) ; v1(4568,1813) 4568,1892 v1(4573,1897)
VCCINT_SHUNTLOW: B1.1 B2.1 B3.1 J3.C2 R17.1 U3.A2 U3.AB4 U3.AB23 U3.AC3 U3.AC12 U3.AC24 U3.AD2 U3.AD25 U3.AE1 U3.AE26 U3.B3 U3.C4 U3.D5 U3.N4 | length 3570.9
  Component Side w6: 4128,2038 4129,2039 4292,2039
  Component Side w8: 4090.54,2019.68 4109.68,2019.68 4128,2038
  Component Side w10: B2.1@3189.24,2989.5 3189.24,2943.76 3203,2930 3203,2887.55 U3.AE26@3283.47,2807.09 ; 4292,2039 4293,2040 4314,2040 4324.24,2050.24 B1.1@4355.5,2050.24
  Component Side w12: U3.AE26@3283.47,2807.09 U3.AD25@3322.84,2767.72 U3.AC24@3362.21,2728.35 U3.AB23@3401.58,2688.98 3409.45,2681.11 3433.05,2681.11 3448.81,2665.35 ; 3834.65,2665.36 U3.AC12@3834.65,2728.35 ; 4039.36,2334.64 4080.81,2334.64 4082.46,2333 4123.91,2333 4124.09,2333.18 4148.14,2333.18 U3.N4@4149.61,2334.65 ; 4090.54,2019.68 4108.77,2001.46 4108.77,1981.79 U3.D5@4110.24,1980.32 U3.C4@4149.61,1940.95 U3.B3@4188.98,1901.58 U3.A2@4228.35,1862.21 ; 4098.41,2677.16 4137.79,2677.16 U3.AB4@4149.61,2688.98 U3.AC3@4188.98,2728.35 U3.AD2@4228.35,2767.72 U3.AE1@4267.72,2807.09 4298.09,2807.09
  Component Side w20: 3949.03,2641 4034.36,2641 4039.36,2636 ; B3.1@4327.3,2953.43 4329.89,2950.83 4329.89,2908.11 4335.08,2902.92 4335.08,2874.23 4299,2838.15 4299,2834 4298.09,2833.09 4298.09,2807.09 4304.09,2807.09 4381.89,2884.89 R17.1@4381.89,3035.43 4386,3039.54 4386,3084 4407,3105 4571,3105 4616,3060 J3.C2@4765,3060
  Component Side w25: 3448.81,2665.35 3453.66,2660.5 3829.78,2660.5 3834.64,2665.35 3858.99,2641 3949.03,2641 ; 4090.54,2019.68 4039.36,2070.86 4039.36,2334.64 4039.36,2636 4065.13,2636 4098.41,2669.29
VCCIO: C1.1 C2.1 C3.1 C4.1 C17.1 C18.1 C23.1 C24.1 C25.1 C26.1 C27.1 C28.1 C29.1 C30.1 C31.1 C32.1 C33.1 C34.1 C35.1 C36.1 C37.1 J3.A20 J3.B7 J3.C14 R5.1 R9.2 R10.1 R11.2 U1.3 U2.3 U3.AA4 U3.AA23 U3.AA25 U3.AC1 U3.AC5 U3.AC10 U3.AC11 U3.AC21 U3.AC25 U3.AD26 U3.AF2 U3.AF4 U3.AF22 U3.AF25 U3.D24 U3.E23 U3.M1 U3.M26 U3.N10 U3.N23 U3.P10 U3.P11 U3.R10 U3.R11 U3.T1 U3.T10 U3.T11 U3.T12 U3.U10 U3.U11 U3.U12 U3.W4 | length 13115.9
  Component Side w6: R11.2@2986.35,2681.39 2990.23,2677.51 3018.49,2677.51 3022,2674 3022,2630 3023,2629 3023,2592 3043,2572 3165,2572 3194,2543 3194,2507 3228,2473 3435,2473 ; U3.M26@3283.47,2295.28 3303.19,2315 3385,2315 3401.58,2331.58 U3.N23@3401.58,2334.65 ; U3.AD26@3283.47,2767.72 3303.15,2748.03 U3.AC25@3322.84,2728.35 ; U3.AA25@3322.84,2649.61 3303.15,2669.29 3303.15,2708.66 U3.AC25@3322.84,2728.35 ; U3.AA23@3401.58,2649.61 3381.89,2669.29 3350.39,2669.29 3341.68,2678.01 3341.68,2709.5 U3.AC25@3322.84,2728.35 ; 4092,2866 4092,2854.87 4091.39,2854.26 4091.39,2720.95 4098.43,2713.91
  Component Side w8: 3382,2929 3382.89,2929.89 3382.89,2981.78 C28.1@3391.49,2990.38 ; 4092,2866 4092,2891 ; U3.AC1@4267.72,2728.35 4320.65,2728.35 v1(4383,2666)
  Component Side w10: C35.1@3132.11,2293 3133.25,2294.14 3282.33,2294.14 U3.M26@3283.47,2295.28 ; 3132.27,2833.06 3133.85,2834.64 3216.54,2834.64 U3.AD26@3283.47,2767.72 ; U3.AF25@3322.84,2846.46 3322.84,2885.83 3330.71,2893.7 3381.89,2893.7 ; U3.D24@3362.21,1980.32 U3.E23@3401.58,2019.69 3440.94,2059.05 v1(3452.75,2059.05) 3452.75,2330.71 3448.81,2334.64 U3.N23@3401.58,2334.65 ; 3382,2929 3381.89,2928.89 3381.89,2893.7 ; U3.AA23@3401.58,2649.61 3429.14,2622.05 v1(3480.3,2622.05) ; U3.AF22@3440.95,2846.46 3440.95,2885.83 3433.07,2893.7 3381.89,2893.7 ; J3.B7@3465,1060 3465,1204.51 3482.8,1222.32 R5.1@3482.8,1257 ; U3.AC21@3480.32,2728.35 3481,2727.66 v1(3481,2691) ; R9.2@3483.36,1414 3484.02,1414.66 R9.2@3485.24,1415.88 ; v1(3874.01,2539.37) U3.U11@3874.02,2492.13 ; U3.AC11@3874.02,2728.35 3874.02,2703.5 3884.61,2692.91 3913.39,2692.91 ; U3.AC10@3913.39,2728.35 3913.39,2692.91 ; v1(3952.75,2535.43) 3952.75,2533.46 3913.39,2494.1 U3.U10@3913.39,2492.13 ; v1(3972,2676) 3974.68,2678.68 3974.68,2691.21 3976.38,2692.91 ; v1(3976.37,2374.01) U3.P10@3913.39,2374.02 ; v1(3976.37,2452.75) U3.T10@3913.39,2452.76 ; U3.AC5@4110.24,2728.35 4110.24,2725.73 4098.43,2713.91 4098.43,2704.72 4086.61,2692.91 3976.38,2692.91 ; U3.W4@4149.61,2570.87 v1(4098.41,2570.86) 4098.41,2622.04 4124.76,2648.39 4148.39,2648.39 U3.AA4@4149.61,2649.61 ; U3.AF4@4149.61,2846.46 4149.61,2909.61 4169.94,2929.94 C32.1@4208.42,2929.94 4211,2927.36 4211,2904 4228.35,2886.65 U3.AF2@4228.35,2846.46 ; U3.M1@4267.72,2295.28 4306.28,2295.28 4333,2322 v1(4339,2316) ; U3.T1@4267.72,2452.76 4320.45,2452.76 4334.21,2439 v1(4338,2439) ; U3.P11@3874.02,2374.02 U3.P10@3913.39,2374.02 ; U3.P11@3874.02,2374.02 U3.R11@3874.02,2413.39 ; U3.P11@3874.02,2374.02 U3.N10@3913.39,2334.65 U3.P10@3913.39,2374.02 ; U3.R11@3874.02,2413.39 U3.R10@3913.39,2413.39 ; U3.R11@3874.02,2413.39 U3.T11@3874.02,2452.76 ; U3.T11@3874.02,2452.76 U3.U11@3874.02,2492.13 ; U3.T11@3874.02,2452.76 U3.T12@3834.65,2452.76 U3.U12@3834.65,2492.13 U3.U11@3874.02,2492.13 ; U3.T11@3874.02,2452.76 U3.T10@3913.39,2452.76 ; U3.U11@3874.02,2492.13 U3.U10@3913.39,2492.13 ; U3.P10@3913.39,2374.02 U3.R10@3913.39,2413.39 ; U3.R10@3913.39,2413.39 U3.T10@3913.39,2452.76 ; U3.T10@3913.39,2452.76 U3.U10@3913.39,2492.13 ; 3913.39,2692.91 3976.38,2692.91
  Component Side w12: R5.1@3482.8,1257 3484.02,1258.22 R9.2@3484.02,1414.66 ; R9.2@3485.24,1415.88 3485.24,1486.24 3498,1499 3940.02,1499 3949.02,1508 4138.29,1508 4210.29,1580 4244,1580 4436,1772 4436,1813.94 4421.94,1828 4379,1828 4368,1839 4368,1866.94 4371.56,1870.49 v1(4371.56,1900.59) ; U2.3@3576.78,3363 3656,3363 3667,3352 3667,3252.89 C4.1@3671.89,3248 3668.17,3244.28 3668.17,3190.72 C3.1@3664.44,3187 ; U1.3@4022.64,3360.83 4098.17,3360.83 4115.89,3343.11 C2.1@4115.89,3234 4112.17,3230.28 4112.17,3175.72 C1.1@4108.44,3172 ; 4092,2891 4110.61,2909.61 4149.61,2909.61
  Component Side w20: J3.A20@2865,1260 2997,1260 3108.5,1371.5 ; C37.1@3057.11,1390 3059.71,1387.4 3092.6,1387.4 3108.5,1371.5 ; C18.1@3110.85,2834.64 3112.43,2833.06 3132.27,2833.06 ; v1(3302,1515) 3252,1515 3108.5,1371.5 ; C28.1@3391.49,2990.38 3396.11,2995 3471,2995 ; 3435,2473 3498,2473 3521.48,2496.48 3521.48,2580.87 ; v1(3452.75,2059.05) v1(4001.97,2059.05) 4006,2063.09 4006,2266 3976.37,2295.63 v1(3976.37,2374.01) ; v1(3471,2927) 3471,2995 ; v1(3480,3189) 3471,3180 3471,2995 ; v1(3480.3,2622.05) 3521.48,2580.87 ; v1(3604,3195) 3604.77,3194.23 3659.68,3194.23 3664.44,3189.47 C3.1@3664.44,3187 3669.2,3182.24 3669.2,3153.51 3673.72,3149 3772,3149 3808,3185 v1(3915,3185) ; v1(3874.01,2539.37) 3874.58,2539.94 3874.58,2580.45 3875,2580.87 3521.48,2580.87 ; v1(3988,3191) 3988,3189 4005,3172 C1.1@4108.44,3172 ; v1(4371.56,1900.59) 4433.41,1900.59 4476,1858 C23.1@4639.6,1858 ; C23.1@4639.05,1848.2 4639.6,1848.75 C23.1@4639.6,1858 ; C24.1@4640.15,1902.29 4639.6,1901.74 C23.1@4639.6,1858 ; J3.C14@4765,1860 4763,1858 C23.1@4639.6,1858
  Solder Side w12: v1(3302,1515) 3446,1515 v1(3482,1479) ; v1(3452.75,2059.05) 3564.56,2059.05 C30.1@3566.92,2061.42
  Solder Side w20: v1(3471,2927) 3481,2917 v1(3481,2691) 3481,2622.74 v1(3480.3,2622.05) C31.1@3525.97,2622.05 ; v1(3480,3189) 3598,3189 v1(3604,3195) ; C33.1@3821.25,2543.31 3944.06,2543.31 3951.93,2535.43 v1(3952.75,2535.43) ; C27.1@3833.39,2646.66 3971.34,2646.66 3973.63,2644.37 ; v1(3915,3185) 3921,3191 v1(3988,3191) ; C36.1@3958.11,2058 4000.91,2058 v1(4001.97,2059.05) ; v1(3972,2676) 3972,2664.34 3982.79,2653.54 ; C34.1@3990.31,2325.01 3992.62,2327.31 3992.62,2350.39 ; C26.1@4043.31,2322.83 4043.31,2350.39 ; 4098,2399 4076.02,2399 4059.66,2382.65 4059.66,2366.75 4043.31,2350.39 ; 4098.42,2399 4339,2399 ; v1(4338,2439) 4338.77,2438.23 4338.77,2399.23 4339,2399 ; v1(4339,2316) 4339,2399 ; v1(4383,2666) 4379,2666 4283.86,2570.86 v1(4098.41,2570.86) 4098.41,2637.81 4082.68,2653.54 C25.1@4031.5,2653.54 3982.79,2653.54 ; v1(3952.75,2535.43) 3952.75,2623.49 3973.63,2644.37 ; v1(3952.75,2535.43) 3952.75,2534.62 3976.37,2511 v1(3976.37,2452.75) v1(3976.37,2374.01) 3975.79,2373.44 3975.79,2352.76 3973.43,2350.39 3992.62,2350.39 ; 3973.63,2644.37 3982.79,2653.54 ; 3992.62,2350.39 4043.31,2350.39
  Solder Side w25: v1(4001.97,2059.05) 4047.41,2104.5 4167.65,2104.5 v1(4371.56,1900.59)
pads on no net: D1.0 D2.0 J1.1 J1.4 J1.5 J1.6 J1.8 J1.9 J2.3 J3.A1 J3.A5 J3.A19 J3.B2 J3.C11 J3.C12 J3.C13 J3.MH1 J3.MH2 J4.3 R1.0 R2.0 R3.0 R4.0 R5.0 R6.0 R7.0 R8.0 R9.0 R10.0 R11.0 R12.0 R13.0 R14.0 R15.0 R16.0 R17.0 R18.0 U1.5 U1.8 U2.5 U2.8 U3.A4 U3.A5 U3.A6 U3.A7 U3.A8 U3.A13 U3.A14 U3.A15 U3.A20 U3.A21 U3.A22 U3.A23 U3.A24 U3.A25 U3.AA1 U3.AA2 U3.AA3 U3.AA24 U3.AB24 U3.AC6 U3.AC7 U3.AC8 U3.AC9 U3.AC13 U3.AC14 U3.AC15 U3.AC16 U3.AC17 U3.AC18 U3.AC20 U3.AC22 U3.AC26 U3.AD4 U3.AD5 U3.AD6 U3.AD7 U3.AD8 U3.AD9 U3.AD10 U3.AD11 U3.AD12 U3.AD13 U3.AD14 U3.AD15 U3.AD16 U3.AD17 U3.AD18 U3.AD20 U3.AD21 U3.AD22 U3.AD23 U3.AE3 U3.AE4 U3.AE5 U3.AE6 U3.AE7 U3.AE8 U3.AE9 U3.AE10 U3.AE11 U3.AE12 U3.AE13 U3.AE14 U3.AE15 U3.AE16 U3.AE17 U3.AE18 U3.AE20 U3.AE21 U3.AE22 U3.AE23 U3.AE24 U3.AF3 U3.AF5 U3.AF6 U3.AF7 U3.AF8 U3.AF9 U3.AF10 U3.AF11 U3.AF12 U3.AF13 U3.AF14 U3.AF17 U3.AF18 U3.AF20 U3.AF21 U3.AF23 U3.AF24 U3.B6 U3.B7 U3.B8 U3.B12 U3.B13 U3.B14 U3.B15 U3.B19 U3.B20 U3.B21 U3.B22 U3.B23 U3.B24 U3.B26 U3.C1 U3.C2 U3.C5 U3.C6 U3.C7 U3.C8 U3.C9 U3.C10 U3.C11 U3.C12 U3.C13 U3.C14 U3.C15 U3.C16 U3.C17 U3.C18 U3.C19 U3.C20 U3.C21 U3.C22 U3.C23 U3.C25 U3.C26 U3.D1 U3.D2 U3.D3 U3.D6 U3.D7 U3.D8 U3.D9 U3.D10 U3.D11 U3.D12 U3.D13 U3.D14 U3.D15 U3.D16 U3.D17 U3.D18 U3.D19 U3.D20 U3.D21 U3.D22 U3.D25 U3.D26 U3.E1 U3.E2 U3.E3 U3.E4 U3.E24 U3.E25 U3.E26 U3.F1 U3.F2 U3.F3 U3.F4 U3.F23 U3.F24 U3.F25 U3.F26 U3.G1 U3.G2 U3.G3 U3.G4 U3.G23 U3.G24 U3.G25 U3.G26 U3.H1 U3.H2 U3.H3 U3.H4 U3.H23 U3.H24 U3.H25 U3.H26 U3.J1 U3.J2 U3.J3 U3.J4 U3.J23 U3.J24 U3.J25 U3.J26 U3.K1 U3.K2 U3.K3 U3.K4 U3.K23 U3.K24 U3.K25 U3.K26 U3.L1 U3.L2 U3.L3 U3.L4 U3.L23 U3.M24 U3.M25 U3.N1 U3.N24 U3.N25 U3.P1 U3.P23 U3.P24 U3.P25 U3.R4 U3.R23 U3.R24 U3.R25 U3.R26 U3.T2 U3.T3 U3.T23 U3.T24 U3.T25 U3.T26 U3.U1 U3.U2 U3.U3 U3.U4 U3.U23 U3.U24 U3.U25 U3.U26 U3.V1 U3.V2 U3.V3 U3.V4 U3.V23 U3.V24 U3.V25 U3.V26 U3.W1 U3.W2 U3.W3 U3.W24 U3.W25 U3.W26 U3.Y1 U3.Y2 U3.Y3 U3.Y4 U3.Y23 U3.Y24 U3.Y25 U3.Y26
copper on no net: | length 58.9
  Component Side w10: 4219.52,3468.62 4227.31,3460.83 4237.72,3460.83 ; 4229.93,3468.62 4237.72,3460.83 ; 4245.08,3460.83 4237.72,3460.83
  Component Side w12: 3799.22,3463 3808.74,3463 3815.54,3469.8

## Polygon pours and split planes (outlines as drawn)
VCCINT on Component Side "Component Side-VCCINT" (solid, pour order 2): 3981,1443 4155,1443 4155,1445 4402,1692 4464,1692 4464,1427 4477,1414 4512,1414 4512,1346 4513,1345 4509,1341 4472,1341 4472,1245 4452,1225 4362,1225 4362,1176 4345,1159 4102,1159 4076,1185 3970,1185 3970,1436 3975,1441
GND on Solder Side "Solder Side-No Net" (solid, remove dead copper, pour order 0): 2793,4215 2797,4211 4917,4211 4917,941 4818,842 4808,852 2650,852 2650,4130 2684,4164

## Silkscreen, mask and mechanical layers (free items; w line width, h text height)
Top Overlay:
  drawing of 48 lines, arcs and shapes, not listed
  text "MPC5676R/MPC5777C / ChipWhisperer / Target CW308 UFO" at 2805.12,3877.95 h78.74
  text "CANA" at 3582.68,3828.74 h50 r90
  text "CANB" at 3216.54,3818.9 h50
  text "GND" at 3188.98,3531.5 h50 r90
  text "SJ1/SJ2 / Set term." at 2972.44,3503.94 h39.37 r90
  text "CANL" at 3385.83,3492.13 h50 r90
  text "CANH" at 3496.06,3488.19 h50 r90
  text "CWDOCS.COM/MP5Y" at 2982.28,3070.87 h35.43
  text "CLKOK" at 4051.75,3056.98 h40
  text "EXTAL" at 2961.88,3007.5 h40 r270
  text "BOOTOK" at 4052.75,2973.78 h40
  text "TXDA" at 2951.6,2541.4 h38
  text "RXDA" at 2949.6,2446.4 h30
  text "0" at 4515.02,2376.75 h40 r90
  text "ETPUB10" at 2953.6,2338.4 h40
  text "1" at 4512.02,2323.75 h40 r90
  text "PLLCFG2" at 4364.02,2238.75 h40 r90
  text "ETPUB13" at 2955.6,2229.4 h40
  text "RST" at 2959.57,2139.02 h40
  text "5V+3.3V" at 4659.02,2098.75 h40 r90
  text "ETPUC29" at 2957.6,2039.4 h40
  text "ETPUC31" at 2957.6,1938.98 h40
  text "ETPUC30" at 2958.6,1839.55 h40
  text "TEST" at 4283.02,1652.75 h40 r90
  text "BOOTCFG1" at 2961.6,1542.01 h40
  text "NewAE Technology Inc." at 3420.81,1505.7 h59.06
  text "ETPUC28" at 2962.6,1437.01 h40
  text "LED1 / RSTOUT" at 4199.15,1340.16 h39.84 r90
  text "JCOMP" at 3936.57,1221 h35.43 r90
  text "JTAG Programming Port" at 2972.44,1181.1 h35.43
  text "GND" at 3990.34,1150.16 h40 r90
  text "EVTI" at 4086.72,1150.16 h40 r90
  text "GND" at 4189.34,1150.16 h40 r90
Bottom Overlay:
  lines w11.81: 3240.15,1881.89 3240.15,1822.83 3299.2,1822.83 ; 3244.08,2826.77 3244.08,2885.82 3303.14,2885.82 ; 3755.9,2354.33 3795.27,2354.33 ; 3775.58,2334.64 3775.58,2374.01 ; 4248.02,1822.83 4307.08,1822.83 4307.08,1877.95 ; 4248.02,2885.82 4307.08,2885.82 4307.08,2826.77
  text "CANA  DB9 / CANL Pin 2 / CANH Pin 7 / GND  Pin 3" at 4458.66,3828.74 h47.24
  text "GND" at 3140.08,3533.5 h50 r270
  text "CANH" at 3443.99,3490.19 h50 r270
  text "CANL" at 3336.23,3489.13 h50 r270
  text "GND" at 4064.08,3356.5 h50 r270
  text "CANH" at 4367.99,3313.19 h50 r270
  text "CANL" at 4260.23,3312.13 h50 r270
  text "ENGCLK" at 4428,2678 h40
  text "GND" at 4428,2577 h40
  text "NewAE Technology Inc." at 4291.15,1708.54 h50
  text "NAE-CW308T-MPC5Y-03" at 4292.96,1625.87 h50
  text "RoHS / PB-Free" at 4255.72,1558.94 h50
  text "C" at 3556.68,1446.47 h250
  text "W" at 3103.92,1397.26 h250
  text "p" at 3330.3,1387.42 h250
  text "NRST" at 3530.99,1157.19 h50 r270
  text "TDI" at 3036.99,1153.19 h50 r270
  text "TDO" at 3137.99,1152.19 h50 r270
  text "TCK" at 3340.99,1152.19 h50 r270
  text "TMS" at 3239.99,1151.19 h50 r270
Mechanical 1:
  the board outline again, w10

## Text inside footprints (layer, text, board x,y; h text height)
J1: Top Overlay "9" at 4037.59,3824.92 h39.37; Top Overlay "1" at 4435.59,3722.76 h39.37